# Altium PCB PCB1.PcbDoc
Units mil, origin at the board's own origin, x right, y up, seen from the top; angles counter-clockwise.
Board outline 3900 x 3900 mil, 2 copper layers (Top Layer, Bottom Layer); 30 components, 19 nets, 152 pads, 2 vias.
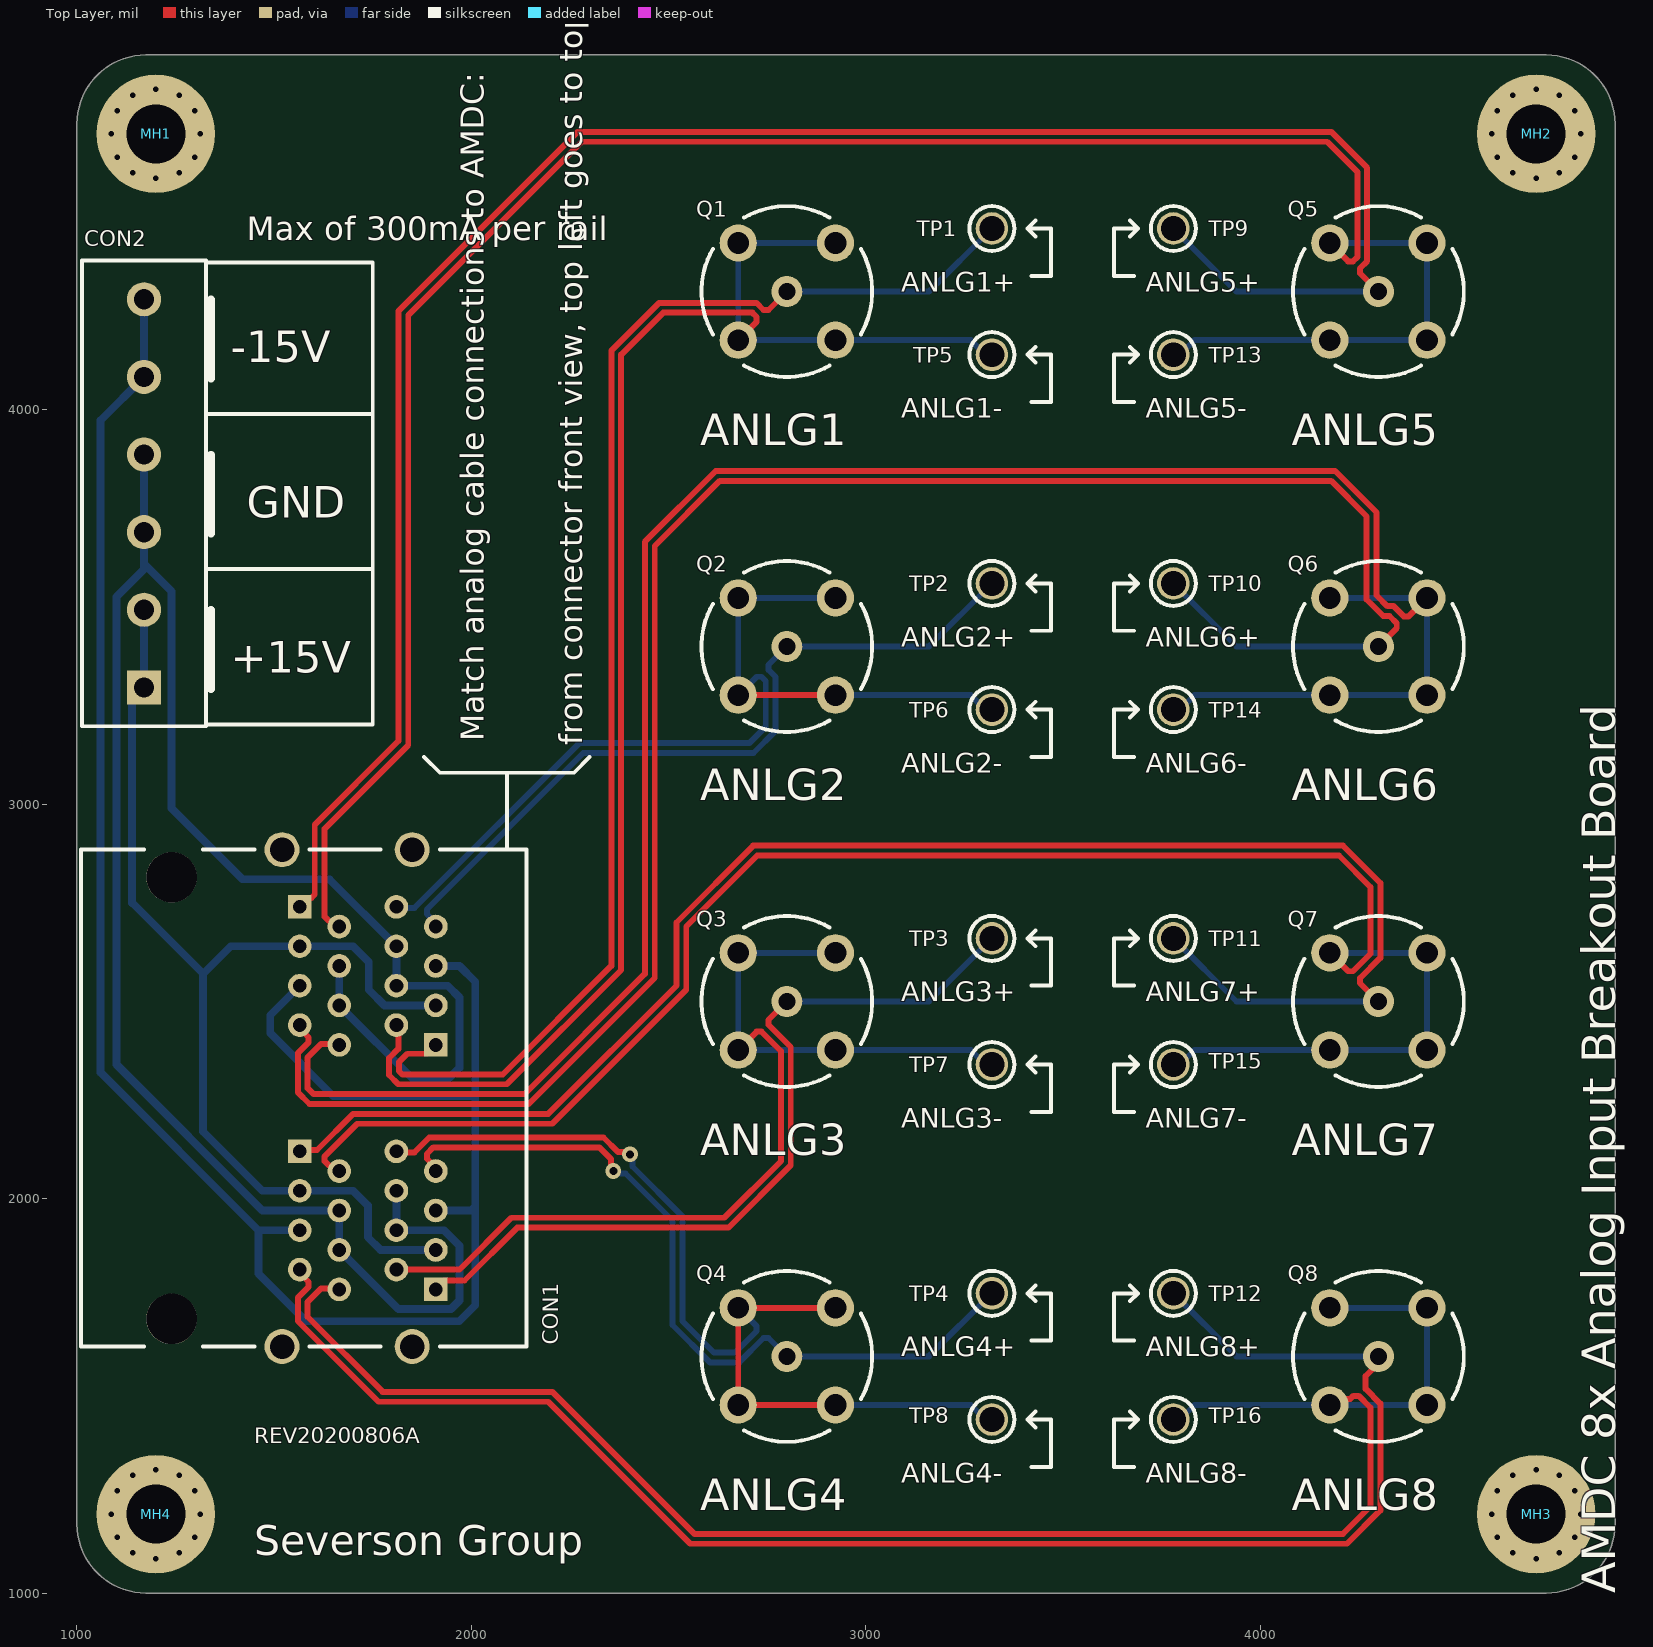
[diagram p0: Top Layer view]
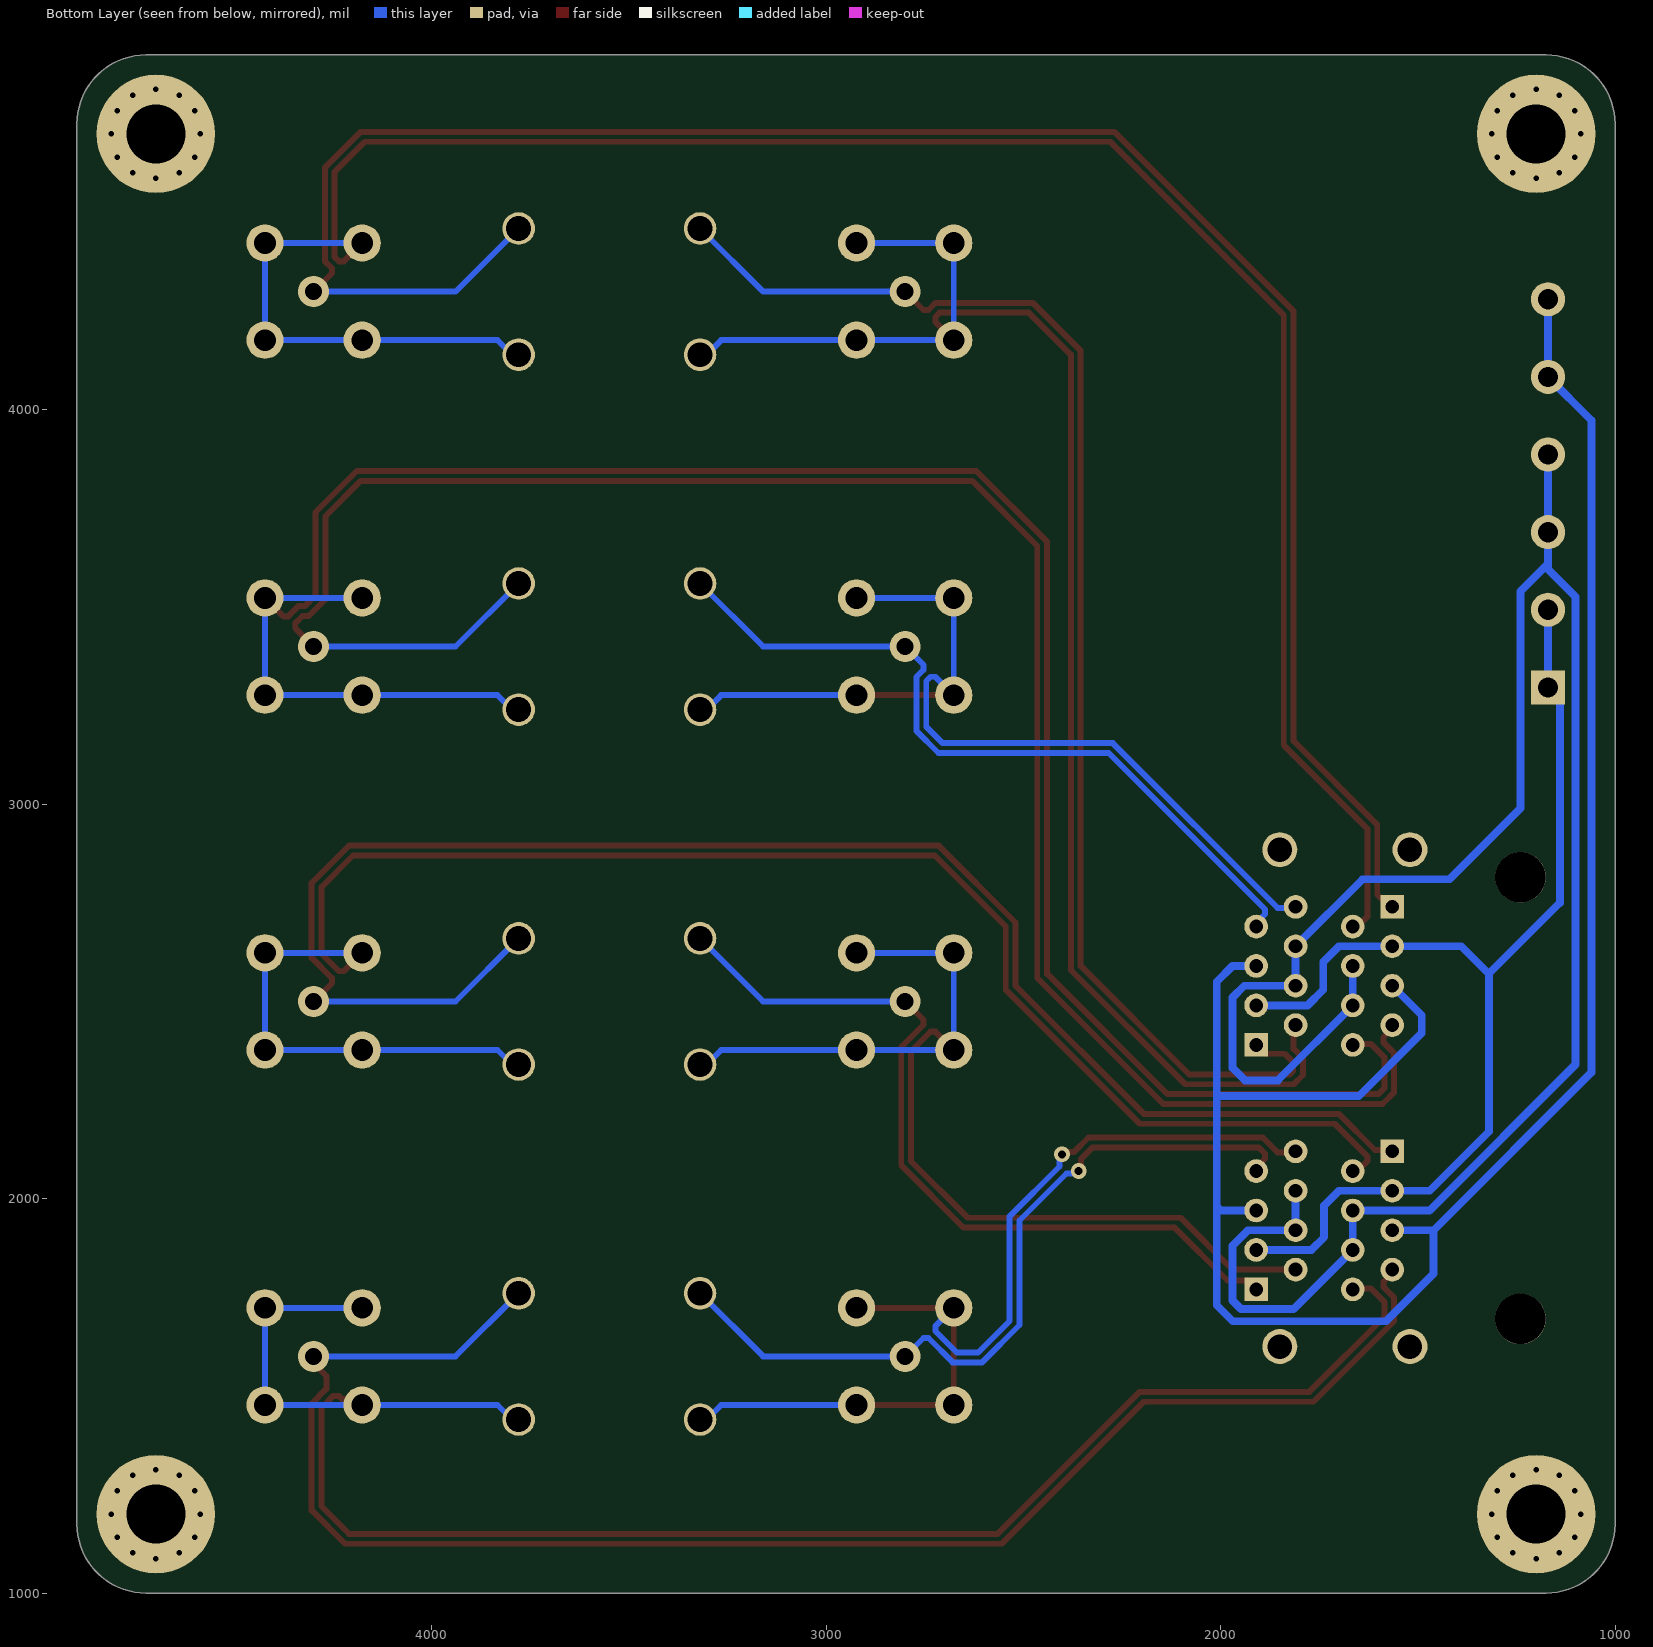
[diagram p1: Bottom Layer view, seen from below]

## Layer stack, top to bottom
Top Solder: solder mask 0.4, Solder Resist, Dk 3.5
Top Layer: signal copper 1.4
Dielectric 1: dielectric 12.6, FR-4, Dk 4.8
Bottom Layer: signal copper 1.4
Bottom Solder: solder mask 0.4, Solder Resist, Dk 3.5

## Board outline
1000,1175 ccw(c1175,1175) 1175,1000 4725,1000 ccw(c4725,1175) 4900,1175 4900,4725 ccw(c4725,4725) 4725,4900 1175,4900 ccw(c1175,4725) 1000,4725

## Design rules (kind name [scope] priority, off if disabled: settings)
Clearance [All] p1: gap=10 ignorepadtopadclearanceinfootprint=FALSE except(0: Arc-Hole Track-Hole SMDPad-Hole THPad-Hole Via-Hole Fill-Hole Poly-Hole Region-Hole Text-Hole)
DiffPairsRouting [All] p1: maxlimit=10 minlimit=10 mostfreqgap=10 toplayer_minwidth=15 toplayer_maxwidth=15 toplayer_prefwidth=15 bottomlayer_minwidth=15 bottomlayer_maxwidth=15 bottomlayer_prefwidth=15 maxuncoupledlength=2000
Height [All] p1: minheight=0 maxheight=2000 prefheight=500
HoleSize [All] p1: absolutevalues=TRUE maxlimit=250 minlimit=14 maxpercent=80.000 minpercent=20.000
PolygonConnect [All] p1: connectstyle=Relief reliefconductorwidth=10 reliefentries=4 polygonreliefangle="90 Angle" airgapwidth=10
RoutingVias [All] p1: holewidth=15 width=35 viastyle="Through Hole" minholewidth=15 minwidth=35 maxholewidth=30 maxwidth=100
SolderMaskExpansion [All] p1: expansion=4
Width [All] p1: maxlimit=100 minlimit=10 preferedwidth=10
27 further rules are at their usual default settings.

## Classes and differential pairs
differential pair ANLG8: +ANLG8_P -ANLG8_N
differential pair ANLG7: +ANLG7_P -ANLG7_N
differential pair ANLG6: +ANLG6_P -ANLG6_N
differential pair ANLG5: +ANLG5_P -ANLG5_N
differential pair ANLG4: +ANLG4_P -ANLG4_N
differential pair ANLG3: +ANLG3_P -ANLG3_N
differential pair ANLG2: +ANLG2_P -ANLG2_N
differential pair ANLG1: +ANLG1_P -ANLG1_N

## Components (designator, comment, footprint, x,y, rotation, side; value= is the part's Value field where it differs from the comment)
CON1 "RJSAE538004" RJSAE538004 1240,2815 r270 top
CON2 "1935200" 1935200 1170,3788.43 r90 top
MH1 "MOUNT_HOLE" MOUNTING_HOLE 1200,4700 r0 top
MH2 "MOUNT_HOLE" MOUNTING_HOLE 4700,4700 r0 top
MH3 "MOUNT_HOLE" MOUNTING_HOLE 4700,1200 r0 top
MH4 "MOUNT_HOLE" MOUNTING_HOLE 1200,1200 r0 top
Q1 "5-1634503-1" 5-1634503-1 2800,4300 r0 top
Q2 "5-1634503-1" 5-1634503-1 2800,3400 r0 top
Q3 "5-1634503-1" 5-1634503-1 2800,2500 r0 top
Q4 "5-1634503-1" 5-1634503-1 2800,1600 r0 top
Q5 "5-1634503-1" 5-1634503-1 4300,4300 r0 top
Q6 "5-1634503-1" 5-1634503-1 4300,3400 r0 top
Q7 "5-1634503-1" 5-1634503-1 4300,2500 r0 top
Q8 "5-1634503-1" 5-1634503-1 4300,1600 r0 top
TP1 "Test Point" TP_1.6MM 3320,4460 r0 top
TP2 "Test Point" TP_1.6MM 3320,3560 r0 top
TP3 "Test Point" TP_1.6MM 3320,2660 r0 top
TP4 "Test Point" TP_1.6MM 3320,1760 r0 top
TP5 "Test Point" TP_1.6MM 3320,4140 r0 top
TP6 "Test Point" TP_1.6MM 3320,3240 r0 top
TP7 "Test Point" TP_1.6MM 3320,2340 r0 top
TP8 "Test Point" TP_1.6MM 3320,1440 r0 top
TP9 "Test Point" TP_1.6MM 3780,4460 r0 top
TP10 "Test Point" TP_1.6MM 3780,3560 r0 top
TP11 "Test Point" TP_1.6MM 3780,2660 r0 top
TP12 "Test Point" TP_1.6MM 3780,1760 r0 top
TP13 "Test Point" TP_1.6MM 3780,4140 r0 top
TP14 "Test Point" TP_1.6MM 3780,3240 r0 top
TP15 "Test Point" TP_1.6MM 3780,2340 r0 top
TP16 "Test Point" TP_1.6MM 3780,1440 r0 top

## Footprints (in the part's own frame and the unit in brackets; to place one, negate y for a bottom-side part, rotate by r counter-clockwise, add the part's x,y. Pads: shape width x height; smd on the part's side, far side on the other; paste and mask are expansions set on the pad)
5-1634503-1 [mm] "CONN BNC JACK STR 50 OHM PCB"
  round 2 hole 1.1: 1(0,0)
  round 2.4 hole 1.4: 2(-3.13,-3.13) 2(-3.13,3.13) 2(3.13,-3.13) 2(3.13,3.13)
  silkscreen extent -5.5,-5.5 5.5,5.5, body extent -5.5,-5.51 5.5,5.51, height 13.7
1935200 [mm] "TERM BLK 6POS SIDE ENTRY 5MM PCB"
  rect 2.2x2.2 hole 1.3: 1(-12.5,0)
  round 2.2 hole 1.3: 2(-7.5,0) 3(-2.5,0) 4(2.5,0) 5(7.5,0) 6(12.5,0)
  silkscreen extent -15,-4 15,4, body extent -15,-4 15.15,4, height 10
MOUNTING_HOLE [mil]
  round 30 hole 14: 1(-112.5,0) 1(-98.43,-59.06) 1(-98.43,59.06) 1(-59.06,-98.43) 1(-59.06,98.43) 1(0,-112.5) 1(0,112.5) 1(59.06,-98.43) 1(59.06,98.43) 1(98.43,-59.06) 1(98.43,59.06) 1(112.5,0)
  round 300 hole 150: 1(0,0)
RJSAE538004 [mil] "CONN MOD JACK 8P8C R/A SHIELDED"
  rect 60x60 hole 35: 1A(425,670) 1B(1045,670) 1C(75,325) 1D(695,325)
  round 60 hole 35: 2A(375,570) 2B(995,570) 2C(125,425) 2D(745,425) 3A(325,670) 3B(945,670) 3C(175,325) 3D(795,325) 4A(275,570) 4B(895,570) 4C(225,425) 4D(845,425) 5A(225,670) 5B(845,670) 5C(275,325) 5D(895,325) 6A(175,570) 6B(795,570) 6C(325,425) 6D(945,425) 7A(125,670) 7B(745,670) 7C(375,325) 7D(995,325) 8A(75,570) 8B(695,570) 8C(425,425) 8D(1045,425)
  round 88.58 hole 62: SH1(-70,610) SH2(-70,280) SH3(1190,610) SH4(1190,280)
  round 127.95 hole 128: ""(0,0) ""(1120,0)
  silkscreen extent -70,-230 1190,900, body extent -137,-450 1257,900, height 1094
TP_1.6MM [mm]
  round 2.1 hole 1.6: 1(0,0)
  silkscreen extent -1.45,-1.45 1.45,1.45, body extent -1.52,-1.51 1.52,1.53, height 5

## Part data
CON1: "CONN MOD JACK 8P8C R/A SHIELDED", Supplier Part Number 1=RJSAE538004-ND, Supplier 1=Digi-Key
CON2: "TERM BLK 6POS SIDE ENTRY 5MM PCB", Supplier Part Number 1=277-1581-ND, Supplier 1=Digi-Key
MH1 MH2 MH3 MH4: "MOUNTING HOLE"
Q1 Q2 Q3 Q4 Q5 Q6 Q7 Q8: "BNC Connector Jack, Female Socket 50 Ohm Through Hole Solder", Supplier Part Number 1=A97581-ND, Supplier 1=Digi-Key
TP1 TP2 TP3 TP4 TP5 TP6 TP7 TP8 TP9 TP10 TP11 TP12 TP13 TP14 TP15 TP16: Supplier Part Number 1=36-680-ND, Supplier 1=Digi-Key

## Via types
v1: diameter 40, hole 20, Top Layer to Bottom Layer, tented both sides, 2 vias

## Nets (pads, with @x,y where several pads share a name; then routed paths per layer and width w, separated by ;. In a path a pad name is that pad's centre, name@x,y a point inside that pad or via, vN(x,y) a via of type N, cw(c..) or ccw(c..) an arc to the next point about the centre after c; other vN are vias at no path point)
+15V: CON1.3A CON1.3B CON1.3C CON1.3D CON2.1 CON2.2 | length 2893.4
  Bottom Layer w20: CON2.2 CON2.1 1140,3266.3 1140,2750 1320,2570 ; CON1.3B 1770,1870 1737.5,1902.5 1737.5,1982.5 1700,2020 CON1.3D 1470,2020 1320,2170 1320,2570 ; CON1.3A 1780,2490 1740,2530 1740,2600 1700,2640 CON1.3C 1390,2640 1320,2570
-15V: CON1.5A CON1.5B CON1.5C CON1.5D CON2.5 CON2.6 | length 5181.7
  Bottom Layer w20: CON2.6 CON2.5 1060,3973.7 1060,2320 1460,1920 ; CON1.5D 1460,1920 ; CON1.5C 1490,2465 1490,2420 1650,2260 2010,2260 ; CON1.5B 2000,1970 2010,1980 ; CON1.5A 1970,2590 2010,2550 2010,2260 ; 1460,1920 1460,1810 1580.71,1689.29 1969.29,1689.29 2010,1730 2010,1980 ; 2010,1980 2010,2260
ANLG1_N: CON1.2A Q1.2 TP5.1 | length 4038.7
  Top Layer w15: CON1.2A 1815,2435 1815,2380 1791.21,2356.21 1791.21,2313.43 1814.64,2290 2090,2290 2380,2580 2380,4140 2486.52,4246.52 2712.58,4246.52 2723.33,4235.76 2723.33,4223.33 Q1.2@2676.77,4176.77
  Bottom Layer w15: Q1.2@2923.23,4423.23 2676.77,4423.23 2676.77,4176.77 2923.23,4176.77 3266.49,4176.77 3303.26,4140 TP5.1
ANLG1_P: CON1.1A Q1.1 TP1.1 | length 3458.9
  Top Layer w15: CON1.1A 1887.5,2367.5 1837.86,2367.5 1816.21,2345.86 1816.21,2323.79 1825,2315 2079.64,2315 2355,2590.36 2355,4129.64 2355,4150.36 2476.16,4271.52 2722.93,4271.52 2741.01,4253.44 2753.44,4253.44 Q1.1
  Bottom Layer w15: Q1.1 3160,4300 TP1.1
ANLG2_N: CON1.8A Q2.2 TP6.1 | length 2488.6
  Top Layer w15: Q2.2@2676.77,3276.77 Q2.2@2923.23,3276.77
  Bottom Layer w15: CON1.8A 1812.5,2737.5 1855.85,2737.5 2273.35,3155 2705,3155 2746.52,3196.52 2746.52,3312.58 2735.76,3323.33 2723.33,3323.33 2676.77,3276.77 2676.77,3523.23 Q2.2@2923.23,3523.23 ; Q2.2@2923.23,3276.77 3266.49,3276.77 3303.26,3240 TP6.1
ANLG2_P: CON1.7A Q2.1 TP2.1 | length 1951.5
  Bottom Layer w15: CON1.7A 1910,2698.7 1887.41,2721.29 1887.41,2733.71 2283.7,3130 2715.36,3130 2771.52,3186.16 2771.52,3322.93 2753.44,3341.01 2753.44,3353.44 Q2.1 3160,3400 TP2.1
ANLG3_N: CON1.2B Q3.2 TP7.1 | length 2667.3
  Top Layer w15: CON1.2B 1970,1820 2101.52,1951.52 2641.52,1951.52 2785,2095 2785,2374.09 2735.76,2423.33 2723.33,2423.33 Q3.2@2676.77,2376.77
  Bottom Layer w15: Q3.2@2923.23,2623.23 2676.77,2623.23 2676.77,2376.77 2923.23,2376.77 3266.49,2376.77 3303.26,2340 TP7.1
ANLG3_P: CON1.1B Q3.1 TP3.1 | length 2074.7
  Top Layer w15: CON1.1B 1932.5,1792.5 1982.5,1792.5 2116.52,1926.52 2651.87,1926.52 2810,2084.64 2810,2384.45 2753.44,2441.01 2753.44,2453.44 Q3.1
  Bottom Layer w15: Q3.1 3160,2500 TP3.1
ANLG4_N: CON1.8B Q4.2 TP8.1 | length 2577.6
  Top Layer w15: CON1.8B 1812.5,2117.5 1855.85,2117.5 1893.35,2155 2335.1,2155 2371.46,2118.64 2396.21,2118.64 v1(2402.43,2112.43) ; Q4.2@2923.23,1476.77 2676.77,1476.77 2676.77,1723.23 Q4.2@2923.23,1723.23
  Bottom Layer w15: v1(2402.43,2112.43) 2408.64,2106.21 2408.64,2081.46 2535,1955.1 2535,1690 2615,1610 2669.09,1610 2723.33,1664.24 2723.33,1676.67 Q4.2@2676.77,1723.23 ; Q4.2@2923.23,1476.77 3266.49,1476.77 3303.26,1440 TP8.1
ANLG4_P: CON1.7B Q4.1 TP4.1 | length 1999
  Top Layer w15: CON1.7B 1910,2078.7 1887.41,2101.29 1887.41,2113.71 1903.7,2130 2324.75,2130 2353.79,2100.96 2353.79,2076.21 v1(2360,2070)
  Bottom Layer w15: v1(2360,2070) 2366.21,2063.79 2390.96,2063.79 2510,1944.75 2510,1679.64 2604.64,1585 2679.45,1585 2741.01,1646.56 2753.44,1646.56 Q4.1 3160,1600 TP4.1
ANLG5_N: CON1.2C Q5.2 TP13.1 | length 5741.7
  Top Layer w15: CON1.2C 1652.82,2690 1627.98,2714.84 1627.98,2937.98 1840,3150 1840,4240 2280,4680 4170,4680 4246.52,4603.48 4246.52,4387.42 4235.76,4376.67 4223.33,4376.67 Q5.2@4176.77,4423.23
  Bottom Layer w15: TP13.1 3796.74,4140 3833.51,4176.77 4176.77,4176.77 4423.23,4176.77 4423.23,4423.23 Q5.2@4176.77,4423.23
ANLG5_P: CON1.1C Q5.1 TP9.1 | length 5227.3
  Top Layer w15: CON1.1C 1587.5,2762.5 1594.2,2762.5 1602.98,2771.29 1602.98,2948.34 1815,3160.36 1815,4250.36 2269.64,4705 4180.36,4705 4271.52,4613.84 4271.52,4377.07 4253.44,4358.99 4253.44,4346.56 Q5.1
  Bottom Layer w15: TP9.1 3940,4300 Q5.1
ANLG6_N: CON1.8C Q6.2 TP14.1 | length 5760.5
  Top Layer w15: CON1.8C 1662.5,2392.5 1619.15,2392.5 1585,2358.35 1585,2280 1600,2265 2135,2265 2440,2570 2440,3665.36 2619.64,3845 4190.36,3845 4295,3740.36 4295,3530 4322.63,3502.37 4338.53,3502.37 4364.24,3476.67 4376.67,3476.67 Q6.2@4423.23,3523.23
  Bottom Layer w15: TP14.1 3796.74,3240 3833.51,3276.77 4176.77,3276.77 4423.23,3276.77 4423.23,3523.23 Q6.2@4176.77,3523.23
ANLG6_P: CON1.7C Q6.1 TP10.1 | length 5223.4
  Top Layer w15: CON1.7C 1565,2431.3 1587.59,2408.71 1587.59,2396.29 1560,2368.7 1560,2269.64 1589.64,2240 2145.36,2240 2465,2559.64 2465,3655 2630,3820 4180,3820 4270,3730 4270,3519.64 4312.27,3477.37 4328.18,3477.37 4346.56,3458.99 4346.56,3446.56 Q6.1
  Bottom Layer w15: TP10.1 3940,3400 Q6.1
ANLG7_N: CON1.2D Q7.2 TP15.1 | length 4616.1
  Top Layer w15: CON1.2D 1652.82,2070 1627.98,2094.84 1627.98,2107.27 1710.72,2190 2205.36,2190 2545,2529.64 2545,2690 2725,2870 4200,2870 4280,2790 4280,2620.91 4235.76,2576.67 4223.33,2576.67 Q7.2@4176.77,2623.23
  Bottom Layer w15: TP15.1 3796.74,2340 3833.51,2376.77 4176.77,2376.77 4423.23,2376.77 4423.23,2623.23 Q7.2@4176.77,2623.23
ANLG7_P: CON1.1D Q7.1 TP11.1 | length 4121.4
  Top Layer w15: CON1.1D 1568.35,2123.35 1608.71,2123.35 1700.36,2215 2195,2215 2520,2540 2520,2700.36 2714.64,2895 4210.36,2895 4305,2800.36 4305,2610.55 4253.44,2558.99 4253.44,2546.56 Q7.1
  Bottom Layer w15: TP11.1 3940,2500 Q7.1
ANLG8_N: CON1.8D Q8.2 TP16.1 | length 4612
  Top Layer w15: CON1.8D 1662.5,1772.5 1619.15,1772.5 1585,1738.35 1585,1700 1775,1510 2205.36,1510 2565.36,1150 4210,1150 4280,1220 4280,1470 4250,1500 4236.51,1500 4228.49,1491.98 4191.98,1491.98 Q8.2@4176.77,1476.77
  Bottom Layer w15: TP16.1 3796.74,1440 3833.51,1476.77 4176.77,1476.77 4423.23,1476.77 4423.23,1723.23 Q8.2@4176.77,1723.23
ANLG8_P: CON1.7D Q8.1 TP12.1 | length 4170.6
  Top Layer w15: CON1.7D 1565,1811.3 1587.59,1788.71 1587.59,1776.29 1560,1748.7 1560,1689.64 1764.64,1485 2195,1485 2555,1125 4220.36,1125 4305,1209.64 4305,1480.36 4267.68,1517.68 4267.68,1550.43 4300,1582.75 Q8.1
  Bottom Layer w15: TP12.1 3940,1600 Q8.1
GND: CON1.4A CON1.4B CON1.4C CON1.4D CON1.6A CON1.6B CON1.6C CON1.6D CON2.3 CON2.4 | length 5497
  Bottom Layer w20: CON2.4 CON2.3 1170,3610 ; CON1.4C CON1.6C 1855,2300 1938.28,2300 1970,2331.72 1970,2510 1940,2540 CON1.4A CON1.6A 1640,2810 1420,2810 1240,2990 1240,3540 1170,3610 ; CON1.6B CON1.4B 1930.71,1920 1970,1880.71 1970,1741.72 1948.28,1720 1815,1720 CON1.6D CON1.4D 1470,1970 1100,2340 1100,3525.99 1170,3595.99 1170,3610
pads on no net: CON1. CON1.SH1 CON1.SH2 CON1.SH3 CON1.SH4 MH1.1 MH2.1 MH3.1 MH4.1

## Silkscreen, mask and mechanical layers (free items; w line width, h text height)
Top Overlay:
  lines w10: 1330,3202.6 1750,3202.6 1750,3596.3 ; 1330,3596.3 1750,3596.3 ; 1330,3990 1750,3990 ; 1330,4373.7 1750,4373.7 1750,3596.3 ; 1880,3120 1920,3080 2260,3080 2300,3120 ; 2090,2890 2090,3080 ; 3420,1320 3470,1320 3470,1440 3410,1440 ; 3420,1640 3470,1640 3470,1760 3410,1760 ; 3420,2220 3470,2220 3470,2340 3410,2340 ; 3420,2540 3470,2540 3470,2660 3410,2660 ; 3420,3120 3470,3120 3470,3240 3410,3240 ; 3420,3440 3470,3440 3470,3560 3410,3560 ; 3420,4020 3470,4020 3470,4140 3410,4140 ; 3420,4340 3470,4340 3470,4460 3410,4460 ; 3430,1420 3410,1440 ; 3430,1460 3410,1440 ; 3430,1740 3410,1760 ; 3430,1780 3410,1760 ; 3430,2320 3410,2340 ; 3430,2360 3410,2340 ; 3430,2640 3410,2660 ; 3430,2680 3410,2660 ; 3430,3220 3410,3240 ; 3430,3260 3410,3240 ; 3430,3540 3410,3560 ; 3430,3580 3410,3560 ; 3430,4120 3410,4140 ; 3430,4160 3410,4140 ; 3430,4440 3410,4460 ; 3430,4480 3410,4460 ; 3670,1420 3690,1440 ; 3670,1460 3690,1440 ; 3670,1740 3690,1760 ; 3670,1780 3690,1760 ; 3670,2320 3690,2340 ; 3670,2360 3690,2340 ; 3670,2640 3690,2660 ; 3670,2680 3690,2660 ; 3670,3220 3690,3240 ; 3670,3260 3690,3240 ; 3670,3540 3690,3560 ; 3670,3580 3690,3560 ; 3670,4120 3690,4140 ; 3670,4160 3690,4140 ; 3670,4440 3690,4460 ; 3670,4480 3690,4460 ; 3680,1320 3630,1320 3630,1440 3690,1440 ; 3680,1640 3630,1640 3630,1760 3690,1760 ; 3680,2220 3630,2220 3630,2340 3690,2340 ; 3680,2540 3630,2540 3630,2660 3690,2660 ; 3680,3120 3630,3120 3630,3240 3690,3240 ; 3680,3440 3630,3440 3630,3560 3690,3560 ; 3680,4020 3630,4020 3630,4140 3690,4140 ; 3680,4340 3630,4340 3630,4460 3690,4460
  lines w20: 1340,3292.6 1340,3492.6 ; 1340,3686.3 1340,3886.3 ; 1340,4080 1340,4280
  text "Max of 300mA per rail" at 1430,4430 h60
  text "ANLG1+" at 3090,4300 h50
  text "ANLG5+" at 3710,4300 h50
  text "-15V" at 1390,4120.55 h80
  text "ANLG1-" at 3090,3980 h50
  text "ANLG5-" at 3710,3980 h50
  text "ANLG1" at 2580,3910 h80
  text "ANLG5" at 4080,3910 h80
  text "GND" at 1430,3726.85 h80
  text "ANLG2+" at 3090,3400 h50
  text "ANLG6+" at 3710,3400 h50
  text "+15V" at 1390,3333.15 h80
  text "Match analog cable connections to AMDC:" at 2050,3160 h100 r90
  text "from connector front view, top left goes to top left, etc." at 2300,3150 h100 r90
  text "ANLG2-" at 3090,3080 h50
  text "ANLG6-" at 3710,3080 h50
  text "ANLG2" at 2580,3010 h80
  text "ANLG6" at 4080,3010 h80
  text "ANLG3+" at 3090,2500 h50
  text "ANLG7+" at 3710,2500 h50
  text "ANLG3-" at 3090,2180 h50
  text "ANLG7-" at 3710,2180 h50
  text "ANLG3" at 2580,2110 h80
  text "ANLG7" at 4080,2110 h80
  text "ANLG4+" at 3090,1600 h50
  text "ANLG8+" at 3710,1600 h50
  text "REV20200806A" at 1450,1380 h40
  text "ANLG4-" at 3090,1280 h50
  text "ANLG8-" at 3710,1280 h50
  text "ANLG4" at 2580,1210 h80
  text "ANLG8" at 4080,1210 h80
  text "Severson Group" at 1450,1070 h130
  text "AMDC 8x Analog Input Breakout Board" at 4900,1000 h85 r90
Mechanical 1:
  the board outline again, w1